# Altium PCB uz_per_current_measurement_dsub_to_rj45.PcbDoc
Units mil, origin at the board's own origin, x right, y up, seen from the top; angles counter-clockwise.
Board outline 6000 x 4000 mil, 2 copper layers (Top Layer, Bottom Layer); 103 components, 55 nets, 289 pads, 0 vias.
Unrouted connection lines stored in the file: 192.
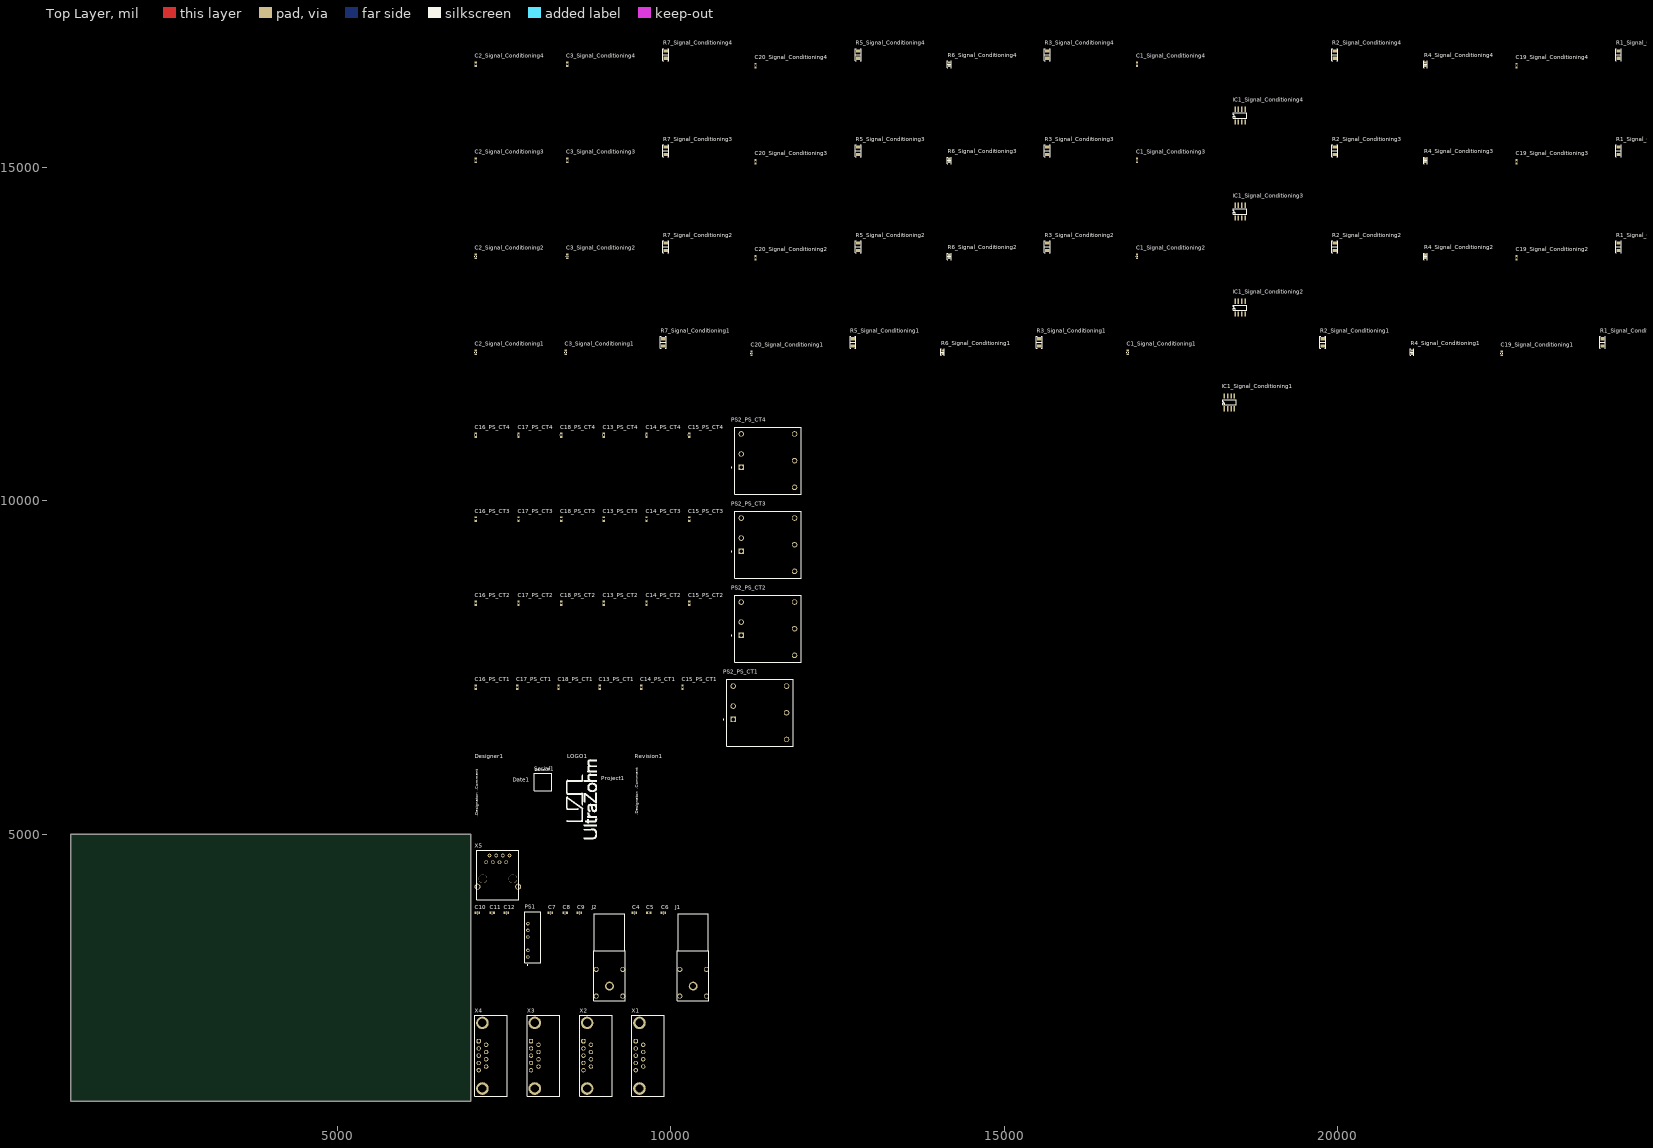
[diagram p0: Top Layer view]
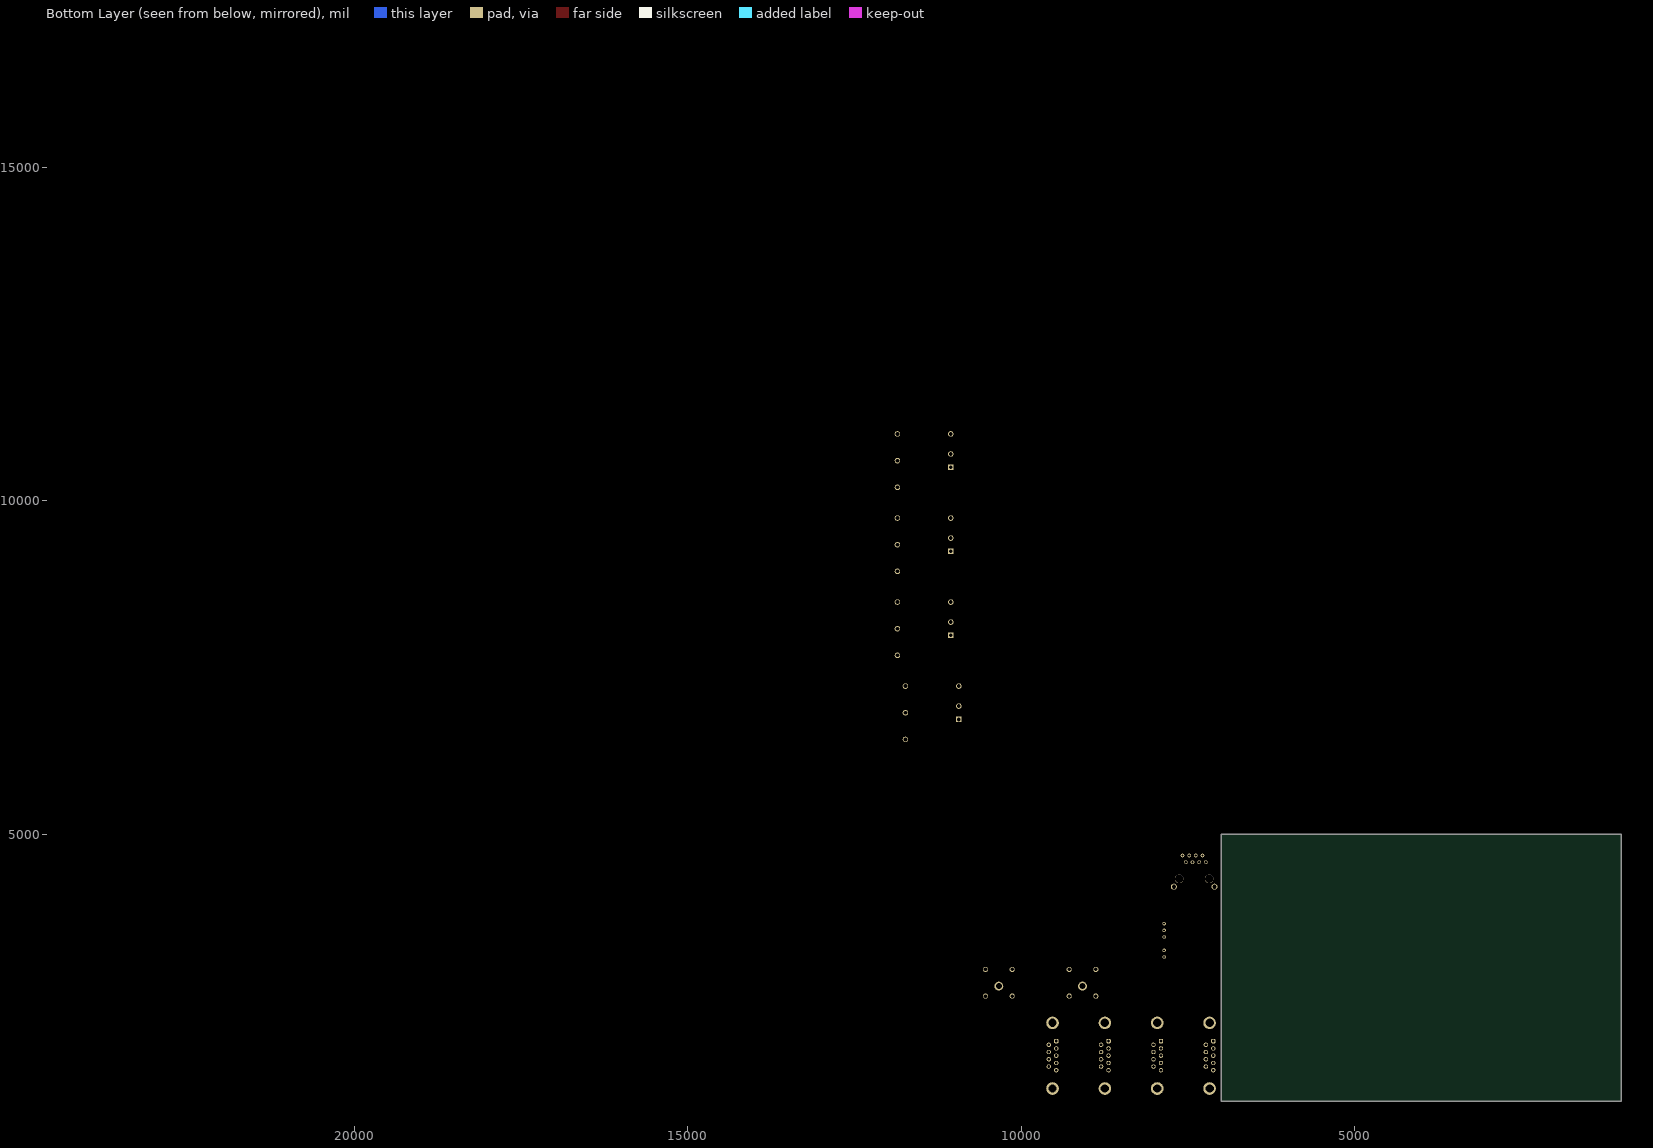
[diagram p1: Bottom Layer view, seen from below]

## Layer stack, top to bottom
Top Solder: solder mask 0.4, Solder Resist, Dk 3.5
Top Layer: signal copper 1.4
Dielectric 1: dielectric 12.6, FR-4, Dk 4.8
Bottom Layer: signal copper 1.4
Bottom Solder: solder mask 0.4, Solder Resist, Dk 3.5

## Board outline
1000,1000 7000,1000 7000,5000 1000,5000

## Design rules (kind name [scope] priority, off if disabled: settings)
Clearance [All] p1: gap=10 ignorepadtopadclearanceinfootprint=FALSE
DiffPairsRouting [All] p1: maxlimit=10 minlimit=10 mostfreqgap=10 toplayer_minwidth=15 toplayer_maxwidth=15 toplayer_prefwidth=15 bottomlayer_minwidth=15 bottomlayer_maxwidth=15 bottomlayer_prefwidth=15 maxuncoupledlength=500
PolygonConnect [All] p1: connectstyle=Relief reliefconductorwidth=10 reliefentries=4 polygonreliefangle="90 Angle" airgapwidth=10
RoutingVias [All] p1: holewidth=28 width=50 viastyle="Through Hole" minholewidth=28 minwidth=50 maxholewidth=28 maxwidth=50
SolderMaskExpansion [All] p1: expansion=4 istentingtop=FALSE
Width [All] p1: maxlimit=10 minlimit=10 preferedwidth=10
29 further rules are at their usual default settings.

## Classes and differential pairs
channel class Signal_Conditioning: Signal_Conditioning1 Signal_Conditioning2 Signal_Conditioning3 Signal_Conditioning4
channel class Power_Supply_Current_Transformers: PS_CT1 PS_CT2 PS_CT3 PS_CT4
net class Output_Return[1..4]: Output_Return1 Output_Return2 Output_Return3 Output_Return4
net class Output[1..4]: Output1 Output2 Output3 Output4
net class GND[1..4]: GND1 GND2 GND3 GND4
net class A_OUT_P[1..4]: A_OUT_P1 A_OUT_P2 A_OUT_P3 A_OUT_P4
net class A_OUT_N[1..4]: A_OUT_N1 A_OUT_N2 A_OUT_N3 A_OUT_N4
net class -15V[1..4]: -15V1 -15V2 -15V3 -15V4
net class +15V[1..4]: +15V1 +15V2 +15V3 +15V4
component class TopSheet: Date1 Designer1 LOGO1 MH1 MH2 Project1 Revision1 Serial1
component class Signal_Conditioning4: C1_Signal_Conditioning4 C2_Signal_Conditioning4 C3_Signal_Conditioning4 C19_Signal_Conditioning4 C20_Signal_Conditioning4 IC1_Signal_Conditioning4 R1_Signal_Conditioning4 R2_Signal_Conditioning4 R3_Signal_Conditioning4 R4_Signal_Conditioning4 R5_Signal_Conditioning4 R6_Signal_Conditioning4 R7_Signal_Conditioning4
component class Signal_Conditioning3: C1_Signal_Conditioning3 C2_Signal_Conditioning3 C3_Signal_Conditioning3 C19_Signal_Conditioning3 C20_Signal_Conditioning3 IC1_Signal_Conditioning3 R1_Signal_Conditioning3 R2_Signal_Conditioning3 R3_Signal_Conditioning3 R4_Signal_Conditioning3 R5_Signal_Conditioning3 R6_Signal_Conditioning3 R7_Signal_Conditioning3
component class Signal_Conditioning2: C1_Signal_Conditioning2 C2_Signal_Conditioning2 C3_Signal_Conditioning2 C19_Signal_Conditioning2 C20_Signal_Conditioning2 IC1_Signal_Conditioning2 R1_Signal_Conditioning2 R2_Signal_Conditioning2 R3_Signal_Conditioning2 R4_Signal_Conditioning2 R5_Signal_Conditioning2 R6_Signal_Conditioning2 R7_Signal_Conditioning2
component class Signal_Conditioning1: C1_Signal_Conditioning1 C2_Signal_Conditioning1 C3_Signal_Conditioning1 C19_Signal_Conditioning1 C20_Signal_Conditioning1 IC1_Signal_Conditioning1 R1_Signal_Conditioning1 R2_Signal_Conditioning1 R3_Signal_Conditioning1 R4_Signal_Conditioning1 R5_Signal_Conditioning1 R6_Signal_Conditioning1 R7_Signal_Conditioning1
component class RJ45_Output: X5
component class PS_Signal_Conditioning: C4 C5 C6 C7 C8 C9 C10 C11 C12 J1 J2 PS1
component class PS_CT4: C13_PS_CT4 C14_PS_CT4 C15_PS_CT4 C16_PS_CT4 C17_PS_CT4 C18_PS_CT4 PS2_PS_CT4
component class PS_CT3: C13_PS_CT3 C14_PS_CT3 C15_PS_CT3 C16_PS_CT3 C17_PS_CT3 C18_PS_CT3 PS2_PS_CT3
component class PS_CT2: C13_PS_CT2 C14_PS_CT2 C15_PS_CT2 C16_PS_CT2 C17_PS_CT2 C18_PS_CT2 PS2_PS_CT2
component class PS_CT1: C13_PS_CT1 C14_PS_CT1 C15_PS_CT1 C16_PS_CT1 C17_PS_CT1 C18_PS_CT1 PS2_PS_CT1
component class DSub_Input: X1 X2 X3 X4
differential pair U_OUT_Signal_Conditioning4: +U_OUT_Signal_Conditioning4_P -U_OUT_Signal_Conditioning4_N
differential pair U_OUT_Signal_Conditioning3: +U_OUT_Signal_Conditioning3_P -U_OUT_Signal_Conditioning3_N
differential pair U_OUT_Signal_Conditioning2: +U_OUT_Signal_Conditioning2_P -U_OUT_Signal_Conditioning2_N
differential pair U_OUT_Signal_Conditioning1: +U_OUT_Signal_Conditioning1_P -U_OUT_Signal_Conditioning1_N

## Components (designator, comment, footprint, x,y, rotation, side; value= is the part's Value field where it differs from the comment)
C1_Signal_Conditioning1 "1 µF" C_0603 16850,12225 r90 top (schematic designator C1)
C1_Signal_Conditioning2 "1 µF" C_0603 16990,13665 r90 top (schematic designator C1)
C1_Signal_Conditioning3 "1 µF" C_0603 16990,15105 r90 top (schematic designator C1)
C1_Signal_Conditioning4 "1 µF" C_0603 16990,16545 r90 top (schematic designator C1)
C2_Signal_Conditioning1 "100 nF" C_0603 7075,12225 r90 top (schematic designator C2)
C2_Signal_Conditioning2 "100 nF" C_0603 7075,13665 r90 top (schematic designator C2)
C2_Signal_Conditioning3 "100 nF" C_0603 7075,15105 r90 top (schematic designator C2)
C2_Signal_Conditioning4 "100 nF" C_0603 7075,16545 r90 top (schematic designator C2)
C3_Signal_Conditioning1 "100 nF" C_0603 8425,12225 r90 top (schematic designator C3)
C3_Signal_Conditioning2 "100 nF" C_0603 8445,13665 r90 top (schematic designator C3)
C3_Signal_Conditioning3 "100 nF" C_0603 8445,15105 r90 top (schematic designator C3)
C3_Signal_Conditioning4 "100 nF" C_0603 8445,16545 r90 top (schematic designator C3)
C4 "1 µF" C_0603 9455,3825 r0 top
C5 "1 µF" C_0603 9670,3825 r0 top
C6 "1 µF" C_0603 9890,3825 r0 top
C7 "1 µF" C_0603 8195,3825 r0 top
C8 "1 µF" C_0603 8415,3825 r0 top
C9 "1 µF" C_0603 8630,3825 r0 top
C10 "1 µF" C_0603 7100,3825 r0 top
C11 "1 µF" C_0603 7320,3825 r0 top
C12 "1 µF" C_0603 7535,3825 r0 top
C13_PS_CT1 "1 µF" C_0603 8935,7205 r90 top (schematic designator C13)
C13_PS_CT2 "1 µF" C_0603 8995,8465 r90 top (schematic designator C13)
C13_PS_CT3 "1 µF" C_0603 8995,9725 r90 top (schematic designator C13)
C13_PS_CT4 "1 µF" C_0603 8995,10985 r90 top (schematic designator C13)
C14_PS_CT1 "1 µF" C_0603 9555,7205 r90 top (schematic designator C14)
C14_PS_CT2 "1 µF" C_0603 9635,8465 r90 top (schematic designator C14)
C14_PS_CT3 "1 µF" C_0603 9635,9725 r90 top (schematic designator C14)
C14_PS_CT4 "1 µF" C_0603 9635,10985 r90 top (schematic designator C14)
C15_PS_CT1 "1 µF" C_0603 10175,7205 r90 top (schematic designator C15)
C15_PS_CT2 "1 µF" C_0603 10275,8465 r90 top (schematic designator C15)
C15_PS_CT3 "1 µF" C_0603 10275,9725 r90 top (schematic designator C15)
C15_PS_CT4 "1 µF" C_0603 10275,10985 r90 top (schematic designator C15)
C16_PS_CT1 "1 µF" C_0603 7075,7205 r90 top (schematic designator C16)
C16_PS_CT2 "1 µF" C_0603 7075,8465 r90 top (schematic designator C16)
C16_PS_CT3 "1 µF" C_0603 7075,9725 r90 top (schematic designator C16)
C16_PS_CT4 "1 µF" C_0603 7075,10985 r90 top (schematic designator C16)
C17_PS_CT1 "1 µF" C_0603 7695,7205 r90 top (schematic designator C17)
C17_PS_CT2 "1 µF" C_0603 7715,8465 r90 top (schematic designator C17)
C17_PS_CT3 "1 µF" C_0603 7715,9725 r90 top (schematic designator C17)
C17_PS_CT4 "1 µF" C_0603 7715,10985 r90 top (schematic designator C17)
C18_PS_CT1 "1 µF" C_0603 8315,7205 r90 top (schematic designator C18)
C18_PS_CT2 "1 µF" C_0603 8355,8465 r90 top (schematic designator C18)
C18_PS_CT3 "1 µF" C_0603 8355,9725 r90 top (schematic designator C18)
C18_PS_CT4 "1 µF" C_0603 8355,10985 r90 top (schematic designator C18)
C19_Signal_Conditioning1 "56 pF" C_0603 22460,12210 r90 top (schematic designator C19)
C19_Signal_Conditioning2 "56 pF" C_0603 22680,13645 r90 top (schematic designator C19)
C19_Signal_Conditioning3 "56 pF" C_0603 22680,15085 r90 top (schematic designator C19)
C19_Signal_Conditioning4 "56 pF" C_0603 22680,16525 r90 top (schematic designator C19)
C20_Signal_Conditioning1 "56 pF" C_0603 11210,12210 r90 top (schematic designator C20)
C20_Signal_Conditioning2 "56 pF" C_0603 11270,13645 r90 top (schematic designator C20)
C20_Signal_Conditioning3 "56 pF" C_0603 11270,15085 r90 top (schematic designator C20)
C20_Signal_Conditioning4 "56 pF" C_0603 11270,16525 r90 top (schematic designator C20)
Date1 "" COMMENT 7625,5755 r90 top
Designer1 "Tom Gaupp" Designator:comment 7105,5270 r90 top
IC1_Signal_Conditioning1 "ADA4940-1ARZ-R7" SOIC-8-N 18300,11380 r90 top value="differential ADC driver" (schematic designator IC1)
IC1_Signal_Conditioning2 "ADA4940-1ARZ-R7" SOIC-8-N 18460,12800 r90 top value="differential ADC driver" (schematic designator IC1)
IC1_Signal_Conditioning3 "ADA4940-1ARZ-R7" SOIC-8-N 18460,14240 r90 top value="differential ADC driver" (schematic designator IC1)
IC1_Signal_Conditioning4 "ADA4940-1ARZ-R7" SOIC-8-N 18460,15680 r90 top value="differential ADC driver" (schematic designator IC1)
J1 "FCR7350R, PCB mount 4mm jack, RED" FCR7350 10335,3155 r90 top value="PCB mount 4mm jack, Red FCR7350R, 1000V, 24A"
J2 "FCR7350B, PCB mount 4mm jack, BLACK" FCR7350 9080,3155 r90 top value="PCB mount 4mm jack, Black	FCR7350B, 1000V, 24A"
LOGO1 "UZ Logo" UZ_Logo_small 8915,4935 r90 top
Project1 "" COMMENT 8955,5755 r90 top
PS1 "TMA 2405D" SIP7 7810,3065 r90 top
PS2_PS_CT1 "REC30K-2415DZ" REC30K 10835,7320 r0 top (schematic designator PS2)
PS2_PS_CT2 "REC30K-2415DZ" REC30K 10955,8580 r0 top (schematic designator PS2)
PS2_PS_CT3 "REC30K-2415DZ" REC30K 10955,9840 r0 top (schematic designator PS2)
PS2_PS_CT4 "REC30K-2415DZ" REC30K 10955,11100 r0 top (schematic designator PS2)
R1_Signal_Conditioning1 "2k" "RES 1206_3216" 23970,12375 r90 top (schematic designator R1)
R1_Signal_Conditioning2 "2k" "RES 1206_3216" 24210,13810 r90 top (schematic designator R1)
R1_Signal_Conditioning3 "2k" "RES 1206_3216" 24210,15250 r90 top (schematic designator R1)
R1_Signal_Conditioning4 "2k" "RES 1206_3216" 24210,16690 r90 top (schematic designator R1)
R2_Signal_Conditioning1 "1k" "RES 1206_3216" 19775,12375 r90 top (schematic designator R2)
R2_Signal_Conditioning2 "1k" "RES 1206_3216" 19955,13810 r90 top (schematic designator R2)
R2_Signal_Conditioning3 "1k" "RES 1206_3216" 19955,15250 r90 top (schematic designator R2)
R2_Signal_Conditioning4 "1k" "RES 1206_3216" 19955,16690 r90 top (schematic designator R2)
R3_Signal_Conditioning1 "10R" "RES 1206_3216" 15525,12375 r90 top (schematic designator R3)
R3_Signal_Conditioning2 "10R" "RES 1206_3216" 15645,13810 r90 top (schematic designator R3)
R3_Signal_Conditioning3 "10R" "RES 1206_3216" 15645,15250 r90 top (schematic designator R3)
R3_Signal_Conditioning4 "10R" "RES 1206_3216" 15645,16690 r90 top (schematic designator R3)
R4_Signal_Conditioning1 "49R9" "RES 0603_1608" 21115,12230 r90 top (schematic designator R4)
R4_Signal_Conditioning2 "49R9" "RES 0603_1608" 21315,13665 r90 top (schematic designator R4)
R4_Signal_Conditioning3 "49R9" "RES 0603_1608" 21315,15105 r90 top (schematic designator R4)
R4_Signal_Conditioning4 "49R9" "RES 0603_1608" 21315,16545 r90 top (schematic designator R4)
R5_Signal_Conditioning1 "1k" "RES 1206_3216" 12730,12375 r90 top (schematic designator R5)
R5_Signal_Conditioning2 "1k" "RES 1206_3216" 12810,13810 r90 top (schematic designator R5)
R5_Signal_Conditioning3 "1k" "RES 1206_3216" 12810,15250 r90 top (schematic designator R5)
R5_Signal_Conditioning4 "1k" "RES 1206_3216" 12810,16690 r90 top (schematic designator R5)
R6_Signal_Conditioning1 "49R9" "RES 0603_1608" 14075,12230 r90 top (schematic designator R6)
R6_Signal_Conditioning2 "49R9" "RES 0603_1608" 14175,13665 r90 top (schematic designator R6)
R6_Signal_Conditioning3 "49R9" "RES 0603_1608" 14175,15105 r90 top (schematic designator R6)
R6_Signal_Conditioning4 "49R9" "RES 0603_1608" 14175,16545 r90 top (schematic designator R6)
R7_Signal_Conditioning1 "2k" "RES 1206_3216" 9885,12375 r90 top (schematic designator R7)
R7_Signal_Conditioning2 "2k" "RES 1206_3216" 9925,13810 r90 top (schematic designator R7)
R7_Signal_Conditioning3 "2k" "RES 1206_3216" 9925,15250 r90 top (schematic designator R7)
R7_Signal_Conditioning4 "2k" "RES 1206_3216" 9925,16690 r90 top (schematic designator R7)
Revision1 "Rev01" Designator:comment 9505,5290 r90 top
Serial1 "Serial #" SERIAL 8030,5865 r0 top
X1 "D-SUB 9, female" 618009231121 9660,1680 r90 top
X2 "D-SUB 9, female" 618009231121 8875,1680 r90 top
X3 "D-SUB 9, female" 618009231121 8090,1680 r90 top
X4 "D-SUB 9, female" 618009231121 7305,1680 r90 top
X5 "R-RJ45R10P-B000" R-RJ45R10P-B000 7405,4430 r0 top

## Footprints (in the part's own frame and the unit in brackets; to place one, negate y for a bottom-side part, rotate by r counter-clockwise, add the part's x,y. Pads: shape width x height; smd on the part's side, far side on the other; paste and mask are expansions set on the pad)
618009231121 [mm] "9 pins, right angled, 8.08mm, with hex screw"
  rrect50% 1.65x1.65 hole 1.09: 1(5.54,4.72)
  round 1.65 hole 1.09: 2(2.77,4.72) 3(0,4.72) 4(-2.77,4.72) 5(-5.54,4.72) 6(4.155,1.88) 7(1.385,1.88) 8(-1.385,1.88) 9(-4.155,1.88)
  round 4.8 hole 3.2: M1(-12.5,3.3) M2(12.5,3.3)
  silkscreen extent -15.4,-6.2 15.4,6.2, body extent -15.4,-12.2 15.4,6.2, height 12.55
C_0603 [mm] "Chip Capacitor, Body 1.6x0.8mm, Height 1.0mm, IPC High Density"
  rect 0.7x0.9 smd: 1(-0.7,0) 2(0.7,0)
  silkscreen extent -0.05,-0.35 0.05,0.35, body extent -0.87,-0.47 0.88,0.48, height 1
COMMENT [mil] "prints out the comment of a component"
Designator:comment [mil] "prints out designator and comment of a component"
FCR7350 [mil]
  round 132.87 hole 88.58: 1(-432.22,0)
  round 76.5 hole 53.15: 2(-581.83,200) 3(-581.83,-200) 4(-181.83,-200) 5(-181.83,200)
  silkscreen extent -649,-236 652,236, body extent -648,-236 651,236, height 485
R-RJ45R10P-B000 [mm]
  round 1.4 hole 0.9: A1(-4.425,3.842) A2(-3.155,6.382) A3(-1.885,3.842) A4(-0.615,6.382) A5(0.655,3.842) A6(1.925,6.382) A7(3.195,3.842) A8(4.465,6.382)
  round 3.25 hole 3.25 unplated: MH3(-5.69,-2.508) MH4(5.74,-2.508)
  round 2.3 hole 1.6: S1(-7.725,-5.5) S2(7.75,-5.5)
  silkscreen extent -8.03,-10.55 8.08,8.45, body extent -7.9,-10.43 7.9,8.37, height 14.5
REC30K [mm]
  rect 2.1x2.1 hole 1.4: 1(2.54,-15.191)
  round 2.1 hole 1.4: 2(2.54,-10.111) 3(2.54,-2.491) 4(22.86,-2.491) 5(22.86,-12.651) 6(22.86,-22.811)
  silkscreen extent -1.29,-25.35 25.4,0.05, body extent -0.1,-25.35 25.3,0.05, height 10.66
"RES 0603_1608" [mm] "Chip Resistor, 2-Leads, Body 1.60x0.80mm, IPC Medium Density"
  rect 0.85x0.95 smd: 1(-0.65,0) 2(0.65,0)
  silkscreen extent -1.27,-0.7 1.27,0.7, body extent -0.8,-0.4 0.8,0.4, height 0.45
"RES 1206_3216" [mm] "Chip Resistor, 2-Leads, Body 3.13x1.55mm, IPC Medium Density"
  rect 1.2x1.65 smd: 1(-1.4,0) 2(1.4,0)
  silkscreen extent -2.3,-1.1 2.3,1.1, body extent -1.6,-0.8 1.6,0.8, height 0.6
SERIAL [mil]
  silkscreen extent -79,-213 181,47
SIP7 [mm]
  round 1.26 hole 0.76: 1(2.4,-1.175) 2(4.94,-1.175) 4(10.02,-1.175) 5(12.56,-1.175) 6(15.1,-1.175)
  silkscreen extent -0.69,-6.1 19.7,0, body extent 0.25,-7.1 19.75,0, height 10.12
SOIC-8-N [mm] "SMD Small Outline IC 8 pin Narrow"
  rect 2x0.55 smd: 1(0,0) 2(0,-1.27) 3(0,-2.54) 4(0,-3.81) 5(4.9,-3.81) 6(4.9,-2.54) 7(4.9,-1.27) 8(4.9,0)
  silkscreen extent 1.46,-4.44 3.44,0.64, body extent -0.64,-4.32 5.56,0.51, height 1.7
UZ_Logo_small [mil] "logo width 3cm"
  silkscreen extent -2,22 1179,477

## Part data
C1_Signal_Conditioning1 C1_Signal_Conditioning2 C1_Signal_Conditioning3 C1_Signal_Conditioning4 C4 C5 C6 C7 C8 C9 C10 C11 C12 C13_PS_CT1 C13_PS_CT2 C13_PS_CT3 C13_PS_CT4 C14_PS_CT1 C14_PS_CT2 C14_PS_CT3 C14_PS_CT4 C15_PS_CT1 C15_PS_CT2 C15_PS_CT3 C15_PS_CT4 C16_PS_CT1 C16_PS_CT2 C16_PS_CT3 C16_PS_CT4 C17_PS_CT1 C17_PS_CT2 C17_PS_CT3 C17_PS_CT4 C18_PS_CT1 C18_PS_CT2 C18_PS_CT3 C18_PS_CT4: library part CL10A105KB8NNNC, "50V 1uF X5R ±10% 0603  Multilayer Ceramic Capacitors MLCC - SMD/SMT ROHS", Device Package=0603, LCSC Part Number=C15849, Manufacturer="Samsung Electro-Mechanics", Operating Temperature="-55 - 85°C", Tolerance="10 %", Voltage Rating="50 VDC", Component Type="Capacitor 0603", ComponentLink1Description=Datasheet, ComponentLink1URL=https://datasheet.lcsc.com/lcsc/1810261812_Samsung-Electro-Mechanics-CL10A105KB8NNNC_C15849.pdf, Created from=MGremer, Created On="20.12.2020 13:54:13", Last Updated="28.11.2022 17:23:01", Live Cycle Status=1, Manufacturer Part Number=CL10A105KB8NNNC, Mounting Type=SMD, PartID=5, Series=M, Stock number="Labor SMD Container", Supplier 1=LCSC, Supplier Part Number 1=C15849, Type=Capacitor
C2_Signal_Conditioning1 C2_Signal_Conditioning2 C2_Signal_Conditioning3 C2_Signal_Conditioning4 C3_Signal_Conditioning1 C3_Signal_Conditioning2 C3_Signal_Conditioning3 C3_Signal_Conditioning4: library part C0603C104K9PACTU, "Capacitor 0603, 6.3 VDC, 100 nF, X5R", Device Package=0603, Manufacturer=KEMET, Operating Temperature="-55 - 85°C", Supplier Part Number 1=80-C0603C104K9P, Tolerance="10 %", Voltage Rating="6.3 VDC", Component Type="Capacitor 0603", ComponentLink1Description=Datasheet, ComponentLink1URL=https://www.mouser.de/datasheet/2/212/KEM_C1006_X5R_SMD-1103249.pdf, Created from=MGremer, Created On="20.12.2020 13:54:13", Last Updated="20.01.2021 13:57:36", Live Cycle Status=1, Manufacturer Part Number=C0603C104K9PACTU, Mounting Type=SMD, PartID=70, Series="SMD Comm X5R", Stock number="not stored", Supplier 1=Mouser, Type=Capacitor
C19_Signal_Conditioning1 C19_Signal_Conditioning2 C19_Signal_Conditioning3 C19_Signal_Conditioning4 C20_Signal_Conditioning1 C20_Signal_Conditioning2 C20_Signal_Conditioning3 C20_Signal_Conditioning4: library part CL10C560JB8NNNC, "Capacitor 0603, 50 VDC, 56 pF, C0G", Device Package=0603, LCSC Part Number=C39148, Manufacturer="Samsung Electro-Mechanics", Operating Temperature="-55 - 125°C", Supplier Part Number 1=187-CL10C560JB8NNNC, Tolerance="5 %", Voltage Rating="50 VDC", Component Type="Capacitor 0603", ComponentLink1Description=Datasheet, ComponentLink1URL=https://www.mouser.de/datasheet/2/585/MLCC-1837944.pdf, Created from=DHufnagel, Created On="20/12/2020 13:54:13", Last Updated="20/12/2020 16:24:16", Live Cycle Status=1, Manufacturer Part Number=CL10C560JB8NNNC, Mounting Type=SMD, PartID=92, Series=CL, Stock number="not stored", Supplier 1=Mouser, Supplier 2=LCSC, Supplier Part Number 2=C39148, Type=Capacitor
Date1: library part 5, "Create a project parameter named \"FinDate\" this is the value of this component. It is printed on the PCB. Once the parameter is updated (e.g. new revision) it gets updated on the PCB as well", Manufacturer="PCB Manufacturer", Manufacturer Part Number="Project End Date", Component Type="Date of Project Finalization", Created from="T. Wendt", Created On="01.03.2021 09:01:41", Last Updated="01.03.2021 09:01:41", Live Cycle Status=1, PartID=5, Type="Standard (No BOM)"
Designer1: library part 4, "Create a project parameter named \"Author\" this is the value of this component. It is printed on the PCB. Once the parameter is updated (e.g. new revision) it gets updated on the PCB as well", Manufacturer="PCB Manufacturer", Manufacturer Part Number="Project Author", Component Type="Project Author", Created from="T. Wendt", Created On="01.03.2021 08:53:41", Last Updated="01.03.2021 09:20:27", Live Cycle Status=1, PartID=4, Type="Standard (No BOM)"
IC1_Signal_Conditioning1 IC1_Signal_Conditioning2 IC1_Signal_Conditioning3 IC1_Signal_Conditioning4: "Differential ADC Driver", Device Package=SOIC-8, LCSC Part Number=C730049, Manufacturer="Analog Devices", Operating Temperature="-40 - 105 °C", Package Reference=SOIC-N-8, Supplier Part Number 1=584-ADA4940-1ARZ-R7, Best.-Nr.="Farnell 209-6178", Channels=1, Class I=Analog, Class II="Fully Differential ADC Drivers (-40-125°C)", Component Type=ADC, ComponentLink1Description=Datasheet, ComponentLink1URL=https://www.mouser.de/datasheet/2/609/ADA4940-1_4940-2-878284.pdf, Created from=MGremer, Created On="15/01/2021 12:16:53", Datasheet="DSO11449, Ver. Aug 2000", Last edited="04.01.2007 10:14", Last Updated="17/02/2026 13:51:19", Live Cycle Status=1, Manufacturer Part Number=ADA4940-1ARZ-R7, Mounting Type=SMD, PartID=3, Resolution=-, Stock number="not stored", Supplier 1=Mouser, Supplier 2=LCSC, Supplier Part Number 2=C730049, Type=ADC
J1: library part FCR7350R, "FCR7350B, 1000V, 24A, RED", Device Package=THT, Manufacturer=Cliff, Operating Temperature="-40°C - 80°C", Supplier Part Number 1=3185-FCR7350R-ND, Component Type="PCB mount 4mm jack, Red", ComponentLink1Description=datasheet, ComponentLink1URL=https://www.cliffuk.co.uk/products/testleads/sockets/S16NPC.pdf, ComponentLink2Description=drawing, ComponentLink2URL=https://media.digikey.com/pdf/Data%20Sheets/Cliff%20Electronic%20LTD%20PDF's/FCR7350_Drawing.pdf, Created from=DHufnagel, Created On="13.06.2022 10:18:11", Last Updated="28.06.2022 13:58:37", Live Cycle Status=1, Manufacturer Part Number=FCR7350R, Minimum Order=1, Mounting Type=THT, PartID=7, Series=S16N-PC, Stock number="not stored", Supplier 1=Digi-Key, Supplier 2=farnell, Supplier Part Number 2=1854508, Type="PCB mount 4mm jack, Red FCR7350R, 1000V, 24A"
J2: library part FCR7350B, "FCR7350B, 1000V, 24A, BLACK", Device Package=THT, Manufacturer=Cliff, Operating Temperature="-40°C - 80°C", Supplier Part Number 1=3185-FCR7350B-ND, Component Type="PCB mount 4mm jack, Black", ComponentLink1Description=datasheet, ComponentLink1URL=https://www.cliffuk.co.uk/products/testleads/sockets/S16NPC.pdf, ComponentLink2Description=drawing, ComponentLink2URL=https://media.digikey.com/pdf/Data%20Sheets/Cliff%20Electronic%20LTD%20PDF's/FCR7350_Drawing.pdf, Created from=DHufnagel, Created On="13.06.2022 10:18:11", Last Updated="28.06.2022 13:58:37", Live Cycle Status=1, Manufacturer Part Number=FCR7350B, Minimum Order=1, Mounting Type=THT, PartID=6, Series=S16N-PC, Stock number="not stored", Supplier 1=Digi-Key, Supplier 2=farnell, Supplier Part Number 2=1854507, Type="PCB mount 4mm jack, Black	FCR7350B, 1000V, 24A"
LOGO1: library part 1, "Official Project Logo of the UltraZohm", Manufacturer="PCB Manufacturer", Manufacturer Part Number="UltraZohm Logo", Component Type=Logo, ComponentLink1Description=Homepage, ComponentLink1URL=https://ultrazohm.com, Created from="T. Wendt", Created On="19.02.2021 16:55:56", Last Updated="02.03.2021 14:31:24", Live Cycle Status=1, PartID=1, Type="Standard (No BOM)"
Project1: library part 2, "Create a project parameter named \"ProjectNameCustom\" this is the value of this component and it is printed on the PCB.", Manufacturer="PCB Manufacturer", Manufacturer Part Number="Project Name", Component Type="Project Name", Created from="T. Wendt", Created On="01.03.2021 08:43:57", Last Updated="01.03.2021 09:07:27", Live Cycle Status=1, PartID=2, Type="Standard (No BOM)"
PS1: "22-26 V Input, +/- 5 V @100mA  Output, 1 W, isolated DC/DC-converter", LCSC Part Number=C6285339, Manufacturer="TRACO Power", Operating Temperature="-40 - 85 °C", Component Type="Isolated DC/DC", ComponentLink1Description=Datasheet, ComponentLink1URL=https://www.lcsc.com/datasheet/C6285339.pdf, Created from=TGaupp, Created On="24/02/2026 14:55:36", Last Updated="24/02/2026 15:06:39", Live Cycle Status=1, Manufacturer Part Number="TMA 2405D", Mounting Type=THT, PartID=21, Stock number="not stored", Supplier 1=LCSC, Supplier Part Number 1=C6285339, Type="Isolated DC/DC"
PS2_PS_CT1 PS2_PS_CT2 PS2_PS_CT3 PS2_PS_CT4: "9-36 V Input, +/- 15 V @1A Output, 30W, isolated DC/DC-converter", Device Package="25.4 mm x 25.4 mm x 10.2 mm", Manufacturer=RECOM, Operating Temperature="-40 - 105°C", Supplier Part Number 1=919-REC30K-2415DZ, Component Type="Isolated DC/DC", ComponentLink1Description=Datasheet, ComponentLink1URL=https://www.mouser.de/datasheet/3/887/1/REC30K__Z_.pdf, Created from=TGaupp, Created On="17/03/2026 15:11:00", Last Updated="17/03/2026 15:11:00", Live Cycle Status=1, Manufacturer Part Number=REC30K-2415DZ, Mounting Type=THT, PartID=23, Stock number="not stored", Supplier 1=Mouser, Type="Isolated DC/DC"
R1_Signal_Conditioning1 R1_Signal_Conditioning2 R1_Signal_Conditioning3 R1_Signal_Conditioning4 R7_Signal_Conditioning1 R7_Signal_Conditioning2 R7_Signal_Conditioning3 R7_Signal_Conditioning4: library part ERA-8AEB202V, "2kΩ ±0.1% 250mW 1206", Device Package=1206, LCSC Part Number=C2073471, Manufacturer=Panasonic, Supplier Part Number 1=667-ERA-8AEB202V, Tolerance=0.1%, Component Type="SMD resistor", ComponentLink1Description=Datasheet, ComponentLink1URL=https://www.lcsc.com/datasheet/C2073471.pdf, Created from=TGaupp, Created On="17/02/2026 13:38:22", Last Updated="17/02/2026 13:39:41", Live Cycle Status=1, Manufacturer Part Number=ERA-8AEB202V, Mounting Type=SMD, PartID=384, Stock number="not stored", Supplier 1=Mouser, Supplier 2=LCSC, Supplier Part Number 2=C2073471, Type=Resistor
R2_Signal_Conditioning1 R2_Signal_Conditioning2 R2_Signal_Conditioning3 R2_Signal_Conditioning4 R5_Signal_Conditioning1 R5_Signal_Conditioning2 R5_Signal_Conditioning3 R5_Signal_Conditioning4: library part ERA-8AEB102V, "SMD resistor 1/4W 1.0Kohm 0.1% 25ppm", Device Package=1206, LCSC Part Number=C491153, Manufacturer=Panasonic, Supplier Part Number 1=667-ERA-8AEB102V, Tolerance=0.1%, Component Type="SMD resistor", ComponentLink1Description=Datasheet, ComponentLink1URL=https://www.mouser.de/datasheet/2/315/AOA0000C307-1149632.pdf, Created from=TGaupp, Created On="08/08/2023 13:03:51", Last Updated="17/02/2026 13:14:39", Live Cycle Status=1, Manufacturer Part Number=ERA-8AEB102V, Mounting Type=SMD, PartID=292, Stock number="not stored", Supplier 1=Mouser, Type=Resistor
R3_Signal_Conditioning1 R3_Signal_Conditioning2 R3_Signal_Conditioning3 R3_Signal_Conditioning4: library part SG73G2BTTD10R0D, "SMD 10 ohm 0.5% 0.5W", Device Package=1206, LCSC Part Number=C5750599, Manufacturer="KOA Speer", Supplier Part Number 1=660-SG73G2BTTD10R0D, Tolerance=0.5%, Component Type="SMD resistor", ComponentLink1Description=Datasheet, ComponentLink1URL=https://www.koaspeer.com/pdfs/SG73G.pdf, Created from=TGaupp, Created On="13/03/2024 10:06:45", Last Updated="17/02/2026 12:57:30", Live Cycle Status=1, Manufacturer Part Number=SG73G2BTTD10R0D, Mounting Type=SMD, PartID=329, Stock number="not stored", Supplier 1=Mouser, Supplier 2=LCSC, Supplier Part Number 2=C5750599, Type=Resistor
R4_Signal_Conditioning1 R4_Signal_Conditioning2 R4_Signal_Conditioning3 R4_Signal_Conditioning4 R6_Signal_Conditioning1 R6_Signal_Conditioning2 R6_Signal_Conditioning3 R6_Signal_Conditioning4: library part RC0603FR-0749R9L, "100mW Thick Film Resistors ±100ppm/℃ ±1% 49.9Ω 0603 Chip Resistor - Surface Mount ROHS", Device Package=0603, LCSC Part Number=C114625, Manufacturer=YAGEO, Supplier Part Number 1=603-RC0402FR-0749R9L, Tolerance=1%, Component Type="SMD resistor", ComponentLink1Description=Datasheet, ComponentLink1URL=https://datasheet.lcsc.com/lcsc/2304140030_YAGEO-RC0603FR-0749R9L_C114625.pdf, Created from=AGeiger, Created On="14.06.2023 17:42:26", Last Updated="14.06.2023 17:42:26", Live Cycle Status=1, Manufacturer Part Number=RC0603FR-0749R9L, Mounting Type=SMD, PartID=277, Supplier 1=Mouser, Type=Resistor
Revision1: library part 3, "Create a project parameter named \"ProjectRevision\" this is the value of this component. It is printed on the PCB. Once the parameter is updated (e.g. new revision) it gets updated on the PCB as well", Manufacturer="PCB Manufacturer", Manufacturer Part Number="Project Revision", Component Type="Project Revision", Created from="T. Wendt", Created On="01.03.2021 08:50:34", Last Updated="01.03.2021 09:28:36", Live Cycle Status=1, PartID=3, Type="Standard (No BOM)"
Serial1: library part 6, "Field to put in a serial number", Manufacturer="PCB Manufacturer", Manufacturer Part Number="Serial Number", Component Type="Serial Number", Created from="T. Wendt", Created On="02.03.2021 14:31:24", Last Updated="02.03.2021 14:31:24", Live Cycle Status=1, PartID=6, Type="Standard (No BOM)"
X1 X2 X3 X4: library part 618009231121, "D-Sub Standard Connectors WR-DSUB Female PCB 9Pin Hex Scrw 8.08mm", Contact Resistance=30mOhm, LCSC Part Number=C141882, Manufacturer="Wuerth Elektronik", Operating Temperature="-40 °C to +85 °C", Operating Temperature Max=105°C, Operating Temperature Min=-55°C, Rated Current=3A, Supplier Part Number 1=710-618009231121, Withstanding Voltage=1000VAC, Working Voltage=125VAC, Category="Input/Output Connectors", ComponentLink1Description=Datasheet, ComponentLink1URL=https://www.we-online.com/components/products/datasheet/618009231121.pdf, ComponentLink2Description="Datasheet Link", ComponentLink2URL=https://www.we-online.com/redexpert/spec/618009231121?ad, Created from=AGeiger, Created On="31/05/2023 13:23:16", Gender=Female, Last Updated="31/05/2023 13:23:16", Manufacturer Part Number=618009231121, Match Code=WR-DSUB, Mount="Through Hole", Mounting Type=THT, Number of Pins=9, Orientation=Angled, Packaging=Tray, PartID=6, Series="D-SUB Standard", Supplier 1=Mouser
X5: "RJ45Receptacle 1 Shielded Bend insert Without LED 0℃~+70℃ Plugin Ethernet Connectors / Modular Connectors (RJ45 RJ11) ROHS", LCSC Part Number=C386758, Manufacturer="Ckmtw(Shenzhen Cankemeng)", Operating Temperature="0 °C to +70 °C", ComponentLink1Description=Datasheet, ComponentLink1URL=https://jlcpcb.com/api/file/downloadByFileSystemAccessId/8588892085580021760, Created from=KIlhan, Created On="20/03/2025 09:19:07", Last Updated="18/05/2025 18:44:47", Manufacturer Part Number=R-RJ45R10P-B000, Mounting Type=THT, PartID=57, Series=RJ45, Supplier 1=LCSC, Supplier Part Number 1=C386758

## Nets (pads, with @x,y where several pads share a name; then routed paths per layer and width w, separated by ;. In a path a pad name is that pad's centre, name@x,y a point inside that pad or via, vN(x,y) a via of type N, cw(c..) or ccw(c..) an arc to the next point about the centre after c; other vN are vias at no path point)
24V_IN: C4.1 C5.1 C6.1 J1.1 PS1.1 PS2_PS_CT1.1 PS2_PS_CT2.1 PS2_PS_CT3.1 PS2_PS_CT4.1
+5V: IC1_Signal_Conditioning1.3 IC1_Signal_Conditioning1.7 IC1_Signal_Conditioning2.3 IC1_Signal_Conditioning2.7 IC1_Signal_Conditioning3.3 IC1_Signal_Conditioning3.7 IC1_Signal_Conditioning4.3 IC1_Signal_Conditioning4.7
+5V_amp: C2_Signal_Conditioning1.2 C2_Signal_Conditioning2.2 C2_Signal_Conditioning3.2 C2_Signal_Conditioning4.2 C7.2 C8.2 C9.2 PS1.6
+15V1: C13_PS_CT1.2 C14_PS_CT1.2 C15_PS_CT1.2 PS2_PS_CT1.6
+15V2: C13_PS_CT2.2 C14_PS_CT2.2 C15_PS_CT2.2 PS2_PS_CT2.6 X2.9
+15V3: C13_PS_CT3.2 C14_PS_CT3.2 C15_PS_CT3.2 PS2_PS_CT3.6
+15V4: C13_PS_CT4.2 C14_PS_CT4.2 C15_PS_CT4.2 PS2_PS_CT4.6
-5V: IC1_Signal_Conditioning1.6 IC1_Signal_Conditioning2.6 IC1_Signal_Conditioning3.6 IC1_Signal_Conditioning4.6
-5V_amp: C3_Signal_Conditioning1.2 C3_Signal_Conditioning2.2 C3_Signal_Conditioning3.2 C3_Signal_Conditioning4.2 C10.1 C11.1 C12.1 PS1.4
-15V1: C16_PS_CT1.1 C17_PS_CT1.1 C18_PS_CT1.1 PS2_PS_CT1.4 X1.5
-15V2: C16_PS_CT2.1 C17_PS_CT2.1 C18_PS_CT2.1 PS2_PS_CT2.4
-15V3: C16_PS_CT3.1 C17_PS_CT3.1 C18_PS_CT3.1 PS2_PS_CT3.4 X3.5
-15V4: C16_PS_CT4.1 C17_PS_CT4.1 C18_PS_CT4.1 PS2_PS_CT4.4 X4.5
A_OUT_N1: R4_Signal_Conditioning1.2 X5.A8
A_OUT_N2: R4_Signal_Conditioning2.2 X5.A5
A_OUT_N3: R4_Signal_Conditioning3.2 X5.A6
A_OUT_N4: R4_Signal_Conditioning4.2 X5.A2
A_OUT_P1: R6_Signal_Conditioning1.2 X5.A7
A_OUT_P2: R6_Signal_Conditioning2.2 X5.A4
A_OUT_P3: R6_Signal_Conditioning3.2 X5.A3
A_OUT_P4: R6_Signal_Conditioning4.2 X5.A1
GND1: C13_PS_CT1.1 C14_PS_CT1.1 C15_PS_CT1.1 C16_PS_CT1.2 C17_PS_CT1.2 C18_PS_CT1.2 PS2_PS_CT1.5 X1.4 X1.M1 X1.M2
GND2: C13_PS_CT2.1 C14_PS_CT2.1 C15_PS_CT2.1 C16_PS_CT2.2 C17_PS_CT2.2 C18_PS_CT2.2 PS2_PS_CT2.5
GND3: C13_PS_CT3.1 C14_PS_CT3.1 C15_PS_CT3.1 C16_PS_CT3.2 C17_PS_CT3.2 C18_PS_CT3.2 PS2_PS_CT3.5
GND4: C13_PS_CT4.1 C14_PS_CT4.1 C15_PS_CT4.1 C16_PS_CT4.2 C17_PS_CT4.2 C18_PS_CT4.2 PS2_PS_CT4.5 X4.4 X4.M1 X4.M2
GND_amp: C1_Signal_Conditioning1.1 C1_Signal_Conditioning2.1 C1_Signal_Conditioning3.1 C1_Signal_Conditioning4.1 C2_Signal_Conditioning1.1 C2_Signal_Conditioning2.1 C2_Signal_Conditioning3.1 C2_Signal_Conditioning4.1 C3_Signal_Conditioning1.1 C3_Signal_Conditioning2.1 C3_Signal_Conditioning3.1 C3_Signal_Conditioning4.1 C7.1 C8.1 C9.1 C10.2 C11.2 C12.2 PS1.5
GND_IN: C4.2 C5.2 C6.2 J2.1 PS1.2 PS2_PS_CT1.2 PS2_PS_CT2.2 PS2_PS_CT3.2 PS2_PS_CT4.2
NetC1_Signal_Conditioning1_2: C1_Signal_Conditioning1.2 IC1_Signal_Conditioning1.2
NetC1_Signal_Conditioning2_2: C1_Signal_Conditioning2.2 IC1_Signal_Conditioning2.2
NetC1_Signal_Conditioning3_2: C1_Signal_Conditioning3.2 IC1_Signal_Conditioning3.2
NetC1_Signal_Conditioning4_2: C1_Signal_Conditioning4.2 IC1_Signal_Conditioning4.2
NetC19_Signal_Conditioning1_1: C19_Signal_Conditioning1.1 IC1_Signal_Conditioning1.8 R1_Signal_Conditioning1.1 R2_Signal_Conditioning1.2
NetC19_Signal_Conditioning2_1: C19_Signal_Conditioning2.1 IC1_Signal_Conditioning2.8 R1_Signal_Conditioning2.1 R2_Signal_Conditioning2.2
NetC19_Signal_Conditioning3_1: C19_Signal_Conditioning3.1 IC1_Signal_Conditioning3.8 R1_Signal_Conditioning3.1 R2_Signal_Conditioning3.2
NetC19_Signal_Conditioning4_1: C19_Signal_Conditioning4.1 IC1_Signal_Conditioning4.8 R1_Signal_Conditioning4.1 R2_Signal_Conditioning4.2
NetC20_Signal_Conditioning1_1: C20_Signal_Conditioning1.1 IC1_Signal_Conditioning1.1 R5_Signal_Conditioning1.2 R7_Signal_Conditioning1.1
NetC20_Signal_Conditioning2_1: C20_Signal_Conditioning2.1 IC1_Signal_Conditioning2.1 R5_Signal_Conditioning2.2 R7_Signal_Conditioning2.1
NetC20_Signal_Conditioning3_1: C20_Signal_Conditioning3.1 IC1_Signal_Conditioning3.1 R5_Signal_Conditioning3.2 R7_Signal_Conditioning3.1
NetC20_Signal_Conditioning4_1: C20_Signal_Conditioning4.1 IC1_Signal_Conditioning4.1 R5_Signal_Conditioning4.2 R7_Signal_Conditioning4.1
Output1: R2_Signal_Conditioning1.1 R3_Signal_Conditioning1.2 X1.6
Output2: R2_Signal_Conditioning2.1 R3_Signal_Conditioning2.2 X2.6
Output3: R2_Signal_Conditioning3.1 R3_Signal_Conditioning3.2 X3.6
Output4: R2_Signal_Conditioning4.1 R3_Signal_Conditioning4.2 X4.6
Output_Return1: R3_Signal_Conditioning1.1 R5_Signal_Conditioning1.1 X1.1
Output_Return2: R3_Signal_Conditioning2.1 R5_Signal_Conditioning2.1 X2.1
Output_Return3: R3_Signal_Conditioning3.1 R5_Signal_Conditioning3.1 X3.1
Output_Return4: R3_Signal_Conditioning4.1 R5_Signal_Conditioning4.1 X4.1
U_OUT_Signal_Conditioning1_N: C19_Signal_Conditioning1.2 IC1_Signal_Conditioning1.5 R1_Signal_Conditioning1.2 R4_Signal_Conditioning1.1
U_OUT_Signal_Conditioning1_P: C20_Signal_Conditioning1.2 IC1_Signal_Conditioning1.4 R6_Signal_Conditioning1.1 R7_Signal_Conditioning1.2
U_OUT_Signal_Conditioning2_N: C19_Signal_Conditioning2.2 IC1_Signal_Conditioning2.5 R1_Signal_Conditioning2.2 R4_Signal_Conditioning2.1
U_OUT_Signal_Conditioning2_P: C20_Signal_Conditioning2.2 IC1_Signal_Conditioning2.4 R6_Signal_Conditioning2.1 R7_Signal_Conditioning2.2
U_OUT_Signal_Conditioning3_N: C19_Signal_Conditioning3.2 IC1_Signal_Conditioning3.5 R1_Signal_Conditioning3.2 R4_Signal_Conditioning3.1
U_OUT_Signal_Conditioning3_P: C20_Signal_Conditioning3.2 IC1_Signal_Conditioning3.4 R6_Signal_Conditioning3.1 R7_Signal_Conditioning3.2
U_OUT_Signal_Conditioning4_N: C19_Signal_Conditioning4.2 IC1_Signal_Conditioning4.5 R1_Signal_Conditioning4.2 R4_Signal_Conditioning4.1
U_OUT_Signal_Conditioning4_P: C20_Signal_Conditioning4.2 IC1_Signal_Conditioning4.4 R6_Signal_Conditioning4.1 R7_Signal_Conditioning4.2
pads on no net: J1.2 J1.3 J1.4 J1.5 J2.2 J2.3 J2.4 J2.5 PS2_PS_CT1.3 PS2_PS_CT2.3 PS2_PS_CT3.3 PS2_PS_CT4.3 X1.2 X1.3 X1.7 X1.8 X1.9 X2.2 X2.3 X2.4 X2.5 X2.7 X2.8 X2.M1 X2.M2 X3.2 X3.3 X3.4 X3.7 X3.8 X3.9 X3.M1 X3.M2 X4.2 X4.3 X4.7 X4.8 X4.9 X5.MH3 X5.MH4 X5.S1 X5.S2